# EAGLE board tableau (EAGLE 8.4.3)

Size 118.09 x 87.3 mm. Coordinates in mm from the lower left corner, seen from the top.
Outline: 0,0 118.09,0 118.09,87.3 0,87.3 0,0
Copper layers (1*16): Top 0.035mm / dielectric 1.5mm / Bottom 0.035mm
Design rules "default": minimum track width 6mil, minimum drill 0.35mm, track to track 6mil, track to pad 6mil, pad to pad 6mil, via to via 6mil, smd to smd 6mil, copper to edge 40mil, drill to drill 6mil, minimum pad ring 10mil, minimum via ring 8mil, stop-mask expansion 4mil, vias tented up to drill 0mil, thermal gap 10mil

## Footprints (pad centres in the part's own frame; a part is rotated, then mirrored left to right if it is on the bottom)
C025-025X050 = drill 0.813 octagon: 1 -1.27,0; 2 1.27,0
E2-5 = drill 0.813 pad 1.27: + -1.016,0 | drill 0.813 pad 1.27 octagon: - 1.016,0
C025-030X050 = drill 0.813 octagon: 1 -1.27,0; 2 1.27,0
DO201T15 = drill 1.499 long: A 7.62,0; C -7.62,0
DIL16 = drill 0.813 long: 1 -8.89,-3.81; 2 -6.35,-3.81; 3 -3.81,-3.81; 4 -1.27,-3.81; 5 1.27,-3.81; 6 3.81,-3.81; 7 6.35,-3.81; 8 8.89,-3.81; 9 8.89,3.81; 10 6.35,3.81; 11 3.81,3.81; 12 1.27,3.81; 13 -1.27,3.81; 14 -3.81,3.81; 15 -6.35,3.81; 16 -8.89,3.81
DIL18 = drill 0.813 long: 1 -10.16,-3.81; 2 -7.62,-3.81; 3 -5.08,-3.81; 4 -2.54,-3.81; 5 0,-3.81; 6 2.54,-3.81; 7 5.08,-3.81; 8 7.62,-3.81; 9 10.16,-3.81; 10 10.16,3.81; 11 7.62,3.81; 12 5.08,3.81; 13 2.54,3.81; 14 0,3.81; 15 -2.54,3.81; 16 -5.08,3.81; 17 -7.62,3.81; 18 -10.16,3.81
TO220-5 = drill 0.9 long: 1 -3.4,-8.4; 2 -1.7,-4.5; 3 0,-8.4; 4 1.7,-4.5; 5 3.4,-8.4
0207/10 = drill 0.813 octagon: 1 -5.08,0; 2 5.08,0
LED3MM = drill 0.813 octagon: A -1.27,0; K 1.27,0
DIL28-3 = drill 0.813 long: 1 -16.51,-3.81; 2 -13.97,-3.81; 3 -11.43,-3.81; 4 -8.89,-3.81; 5 -6.35,-3.81; 6 -3.81,-3.81; 7 -1.27,-3.81; 8 1.27,-3.81; 9 3.81,-3.81; 10 6.35,-3.81; 11 8.89,-3.81; 12 11.43,-3.81; 13 13.97,-3.81; 14 16.51,-3.81; 15 16.51,3.81; 16 13.97,3.81; 17 11.43,3.81; 18 8.89,3.81; 19 6.35,3.81; 20 3.81,3.81; 21 1.27,3.81; 22 -1.27,3.81; 23 -3.81,3.81; 24 -6.35,3.81; 25 -8.89,3.81; 26 -11.43,3.81; 27 -13.97,3.81; 28 -16.51,3.81
QS = drill 0.61 long: 1 -2.54,0; 2 2.54,0
0204/7 = drill 0.813 octagon: 1 -3.81,0; 2 3.81,0
PUSHBUTTON_SMD_SJ = smd 2 x 2: P$1 3,0; P$2 -3,0
DIP254P762X432-8 = drill 0.991 square: 1 -7.62,7.62 | drill 0.991: 2 -7.62,5.08; 3 -7.62,2.54; 4 -7.62,0; 5 0,0; 6 0,2.54; 7 0,5.08; 8 0,7.62
KK-156-8 = drill 1.7 pad 2.184 long: 1 -13.86,0; 2 -9.9,0; 3 -5.94,0; 4 -1.98,0; 5 1.98,0; 6 5.94,0; 7 9.9,0; 8 13.86,0
KK-156-2 = drill 1.7 pad 2.184 long: 1 -1.98,0; 2 1.98,0
KK-156-3 = drill 1.7 pad 2.184 long: 1 -3.96,0; 2 0,0; 3 3.96,0
KK-156-11 = drill 1.7 pad 2.184 long: 1 -19.8,0; 2 -15.84,0; 3 -11.88,0; 4 -7.92,0; 5 -3.96,0; 6 0,0; 7 3.96,0; 8 7.92,0; 9 11.88,0; 10 15.84,0; 11 19.8,0
KK-156-5 = drill 1.7 pad 2.184 long: 1 -7.92,0; 2 -3.96,0; 3 0,0; 4 3.96,0; 5 7.92,0

## Placement (x,y rotation side)
C1  0.1uF,20V  [C025-025X050]  59.69,38.1 0 top
C2  100uF  [E2-5]  111.76,13.97 90 top
C3  100uF  [E2-5]  102.87,24.13 0 top
C4  [C025-030X050]  39.37,8.89 270 top
C5  [C025-030X050]  38.1,13.97 90 top
C6  [C025-025X050]  74.93,54.61 180 top
C7  10uF  [E2-5]  68.58,54.61 180 top
C8  [C025-030X050]  78.74,17.78 180 top
D1  1N5822  [DO201T15]  88.9,15.24 90 top
IC1  74LS47N  [DIL16]  25.4,50.8 90 top
IC3  74LS47N  [DIL16]  49.53,54.61 0 top
IC4  74LS47N  [DIL16]  25.4,19.05 90 top
IC5  LM3914N  [DIL18]  78.74,64.77 0 top
IC6  LM2576T  [TO220-5]  96.52,15.24 90 top
L1  100uH  [0207/10]  93.98,15.24 90 top
LED1  VERT  [LED3MM]  90.17,36.83 180 top
LED2  VERT  [LED3MM]  90.17,31.75 180 top
LED3  VERT  [LED3MM]  90.17,43.18 180 top
PIC18F25K80  PIC18F2580-I/SP  [DIL28-3]  54.61,27.94 0 top
Q2  [QS]  43.18,11.43 270 top
R1  [0204/7]  68.58,20.32 180 top
R2  [0204/7]  99.06,43.18 180 top
R3  [0204/7]  99.06,31.75 180 top
R4  [0204/7]  99.06,36.83 180 top
R28  [0204/7]  53.34,39.37 270 top
R29  [0204/7]  55.88,39.37 270 top
R30  [0204/7]  83.82,55.88 180 top
R31  3.83k  [0204/7]  72.39,48.26 270 top
R32  1.21k  [0204/7]  78.74,48.26 90 top
SW1  [PUSHBUTTON_SMD_SJ]  78.74,10.16 0 top
U$1  MCP2551-I/P  [DIP254P762X432-8]  101.6,50.8 0 top
X1  [KK-156-8]  10.16,33.02 90 top
X2  [KK-156-2]  110.49,66.04 270 top
X3  [KK-156-8]  10.16,66.04 90 top
X4  [KK-156-8]  43.18,78.74 0 top
X5  [KK-156-3]  10.16,10.16 90 top
X6  [KK-156-11]  82.55,78.74 180 top
X7  [KK-156-2]  110.49,34.29 270 top
X8  [KK-156-3]  110.49,53.34 270 top
X9  [KK-156-5]  58.42,6.35 0 top

## Library data of the parts
C1-C5 C7 C8 L1 = rcl
C6 R1-R4 R28-R32 = resistor
D1 = diode
IC1 IC3 IC4 = 74xx-eu
IC5 = linear
IC6 = v-reg-3
LED1-LED3 = led
PIC18F25K80 = microchip; MF: MICROCHIP; MPN: PIC18F2580-I/SP; OC_FARNELL: 9321276; OC_NEWARK: 71J7244
Q2 = special
SW1 = microbuilder
U$1 = mcp2551; DESCRIPTION: CAN CTRL; MPN: MCP2551-I/P; OC_FARNELL: 1292240; OC_NEWARK: 61K2947; PACKAGE: PDIP-8; SUPPLIER: Microchip
X1-X9 = con-molex; OC_FARNELL: unknown; OC_NEWARK: unknown

## Nets
CAN_H: U$1.6 X8.1
CAN_L: U$1.7 X8.3
CAN_RX: PIC18F25K80.24 U$1.4
CAN_TX: PIC18F25K80.23 U$1.1
D0EAU_0: IC4.7 PIC18F25K80.15
D0EAU_1: IC4.1 PIC18F25K80.16
D0EAU_2: IC4.2 PIC18F25K80.25
D0EAU_3: IC4.6 PIC18F25K80.26
D1EAU_0: IC1.7 PIC18F25K80.12
D1EAU_1: IC1.1 PIC18F25K80.11
D1EAU_2: IC1.2 PIC18F25K80.7
D1EAU_3: IC1.6 PIC18F25K80.6
D2EAU: PIC18F25K80.14 X5.1 X5.2
DRAP_0: IC3.7 PIC18F25K80.4
DRAP_1: IC3.1 PIC18F25K80.3
DRAP_2: IC3.2 PIC18F25K80.2
GND: C1.2 C2.- C3.- C4.1 C5.1 C6.2 C7.- C8.1 D1.A IC1.8 IC3.6 IC3.8 IC4.8 IC5.2 IC5.4 IC6.3 IC6.5 LED1.K LED2.K LED3.K PIC18F25K80.8 PIC18F25K80.19 R28.1 R29.1 R31.1 SW1.P$1 U$1.2 U$1.8 X7.2 X8.2 X9.3
HOMING: PIC18F25K80.22 R28.2
MCLR: C8.2 PIC18F25K80.1 R1.1 SW1.P$2 X9.5
N$1: LED1.A R4.2
N$2: IC4.13 X1.1
N$3: LED2.A R3.2
N$6: IC4.12 X1.2
N$7: IC4.11 X1.3
N$8: IC4.10 X1.4
N$9: IC4.9 X1.5
N$10: IC4.15 X1.6
N$11: IC4.14 X1.7
N$12: IC1.13 X3.1
N$13: IC1.12 X3.2
N$14: IC1.11 X3.3
N$15: IC1.10 X3.4
N$16: IC1.9 X3.5
N$17: IC1.15 X3.6
N$18: IC1.14 X3.7
N$19: IC3.13 X4.1
N$20: IC3.12 X4.2
N$21: IC3.11 X4.3
N$22: C2.+ IC6.1
N$23: IC3.10 X4.4
N$24: IC3.9 X4.5
N$25: IC3.15 X4.6
N$26: IC3.14 X4.7
N$27: IC5.10 X6.1
N$28: IC5.11 X6.2
N$29: IC5.12 X6.3
N$30: IC5.13 X6.4
N$31: IC5.14 X6.5
N$32: IC5.15 X6.6
N$33: IC5.16 X6.7
N$34: IC5.17 X6.8
N$35: IC5.18 X6.9
N$36: IC5.1 X6.10
N$58: LED3.A R2.2
N$59: C6.1 IC5.5 R30.2
N$60: IC5.6 IC5.7 R32.2
N$61: IC5.8 R31.2 R32.1
N$62: D1.C IC6.2 L1.1
NEUTRE: PIC18F25K80.21 R29.2
OSC1: C4.2 PIC18F25K80.9 Q2.2
OSC2: C5.2 PIC18F25K80.10 Q2.1
PGC: PIC18F25K80.27 X9.1
PGD: PIC18F25K80.28 X9.2
PWM_SHIFT: PIC18F25K80.13 R30.1
TESTLED_0: PIC18F25K80.5 R2.1
UART_RX: PIC18F25K80.18 X2.2
UART_TX: PIC18F25K80.17 X2.1
VBATTERY: R4.1 X7.1
VCC: C1.1 C3.+ C7.+ IC1.3 IC1.4 IC1.5 IC1.16 IC3.3 IC3.4 IC3.5 IC3.16 IC4.3 IC4.4 IC4.5 IC4.16 IC5.3 IC5.9 IC6.4 L1.2 PIC18F25K80.20 R1.2 R3.1 U$1.3 X1.8 X3.8 X4.8 X5.3 X6.11 X9.4

## Tracks (layer width: path | path; a pad name or v marks a point on that pad's centre or on a via)
CAN_H  (1 unrouted)
CAN_L  (1 unrouted)
CAN_RX  (1 unrouted)
CAN_TX  (1 unrouted)
D0EAU_0  (1 unrouted)
D0EAU_1  (1 unrouted)
D0EAU_2  (1 unrouted)
D0EAU_3  (1 unrouted)
D1EAU_0  (1 unrouted)
D1EAU_1  (1 unrouted)
D1EAU_2  (1 unrouted)
D1EAU_3  (1 unrouted)
D2EAU  (2 unrouted)
DRAP_0  (1 unrouted)
DRAP_1  (1 unrouted)
DRAP_2  (1 unrouted)
GND  (30 unrouted)
HOMING  (1 unrouted)
MCLR  (4 unrouted)
N$1  (1 unrouted)
N$2  (1 unrouted)
N$3  (1 unrouted)
N$6  (1 unrouted)
N$7  (1 unrouted)
N$8  (1 unrouted)
N$9  (1 unrouted)
N$10  (1 unrouted)
N$11  (1 unrouted)
N$12  (1 unrouted)
N$13  (1 unrouted)
N$14  (1 unrouted)
N$15  (1 unrouted)
N$16  (1 unrouted)
N$17  (1 unrouted)
N$18  (1 unrouted)
N$19  (1 unrouted)
N$20  (1 unrouted)
N$21  (1 unrouted)
N$22  (1 unrouted)
N$23  (1 unrouted)
N$24  (1 unrouted)
N$25  (1 unrouted)
N$26  (1 unrouted)
N$27  (1 unrouted)
N$28  (1 unrouted)
N$29  (1 unrouted)
N$30  (1 unrouted)
N$31  (1 unrouted)
N$32  (1 unrouted)
N$33  (1 unrouted)
N$34  (1 unrouted)
N$35  (1 unrouted)
N$36  (1 unrouted)
N$58  (1 unrouted)
N$59  (2 unrouted)
N$60  (2 unrouted)
N$61  (2 unrouted)
N$62  (2 unrouted)
NEUTRE  (1 unrouted)
OSC1  (2 unrouted)
OSC2  (2 unrouted)
PGC  (1 unrouted)
PGD  (1 unrouted)
PWM_SHIFT  (1 unrouted)
TESTLED_0  (1 unrouted)
UART_RX  (1 unrouted)
UART_TX  (1 unrouted)
VBATTERY  (1 unrouted)
VCC  (28 unrouted)